# EAGLE board RFBoardLayoutGen0_v02.7_routed_final_PTworking_backup (EAGLE 7.6.0)
AUTHOR: Kirchschlager Raimund
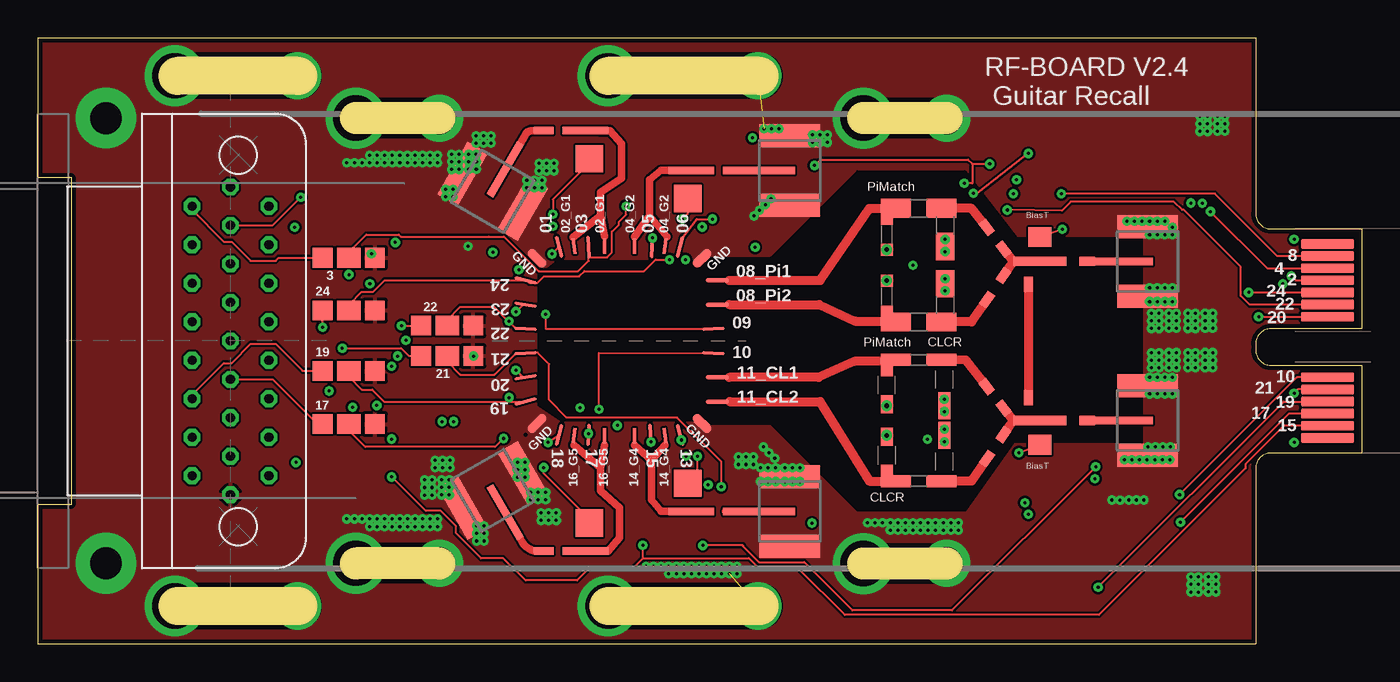
[diagram p0: board, top side]
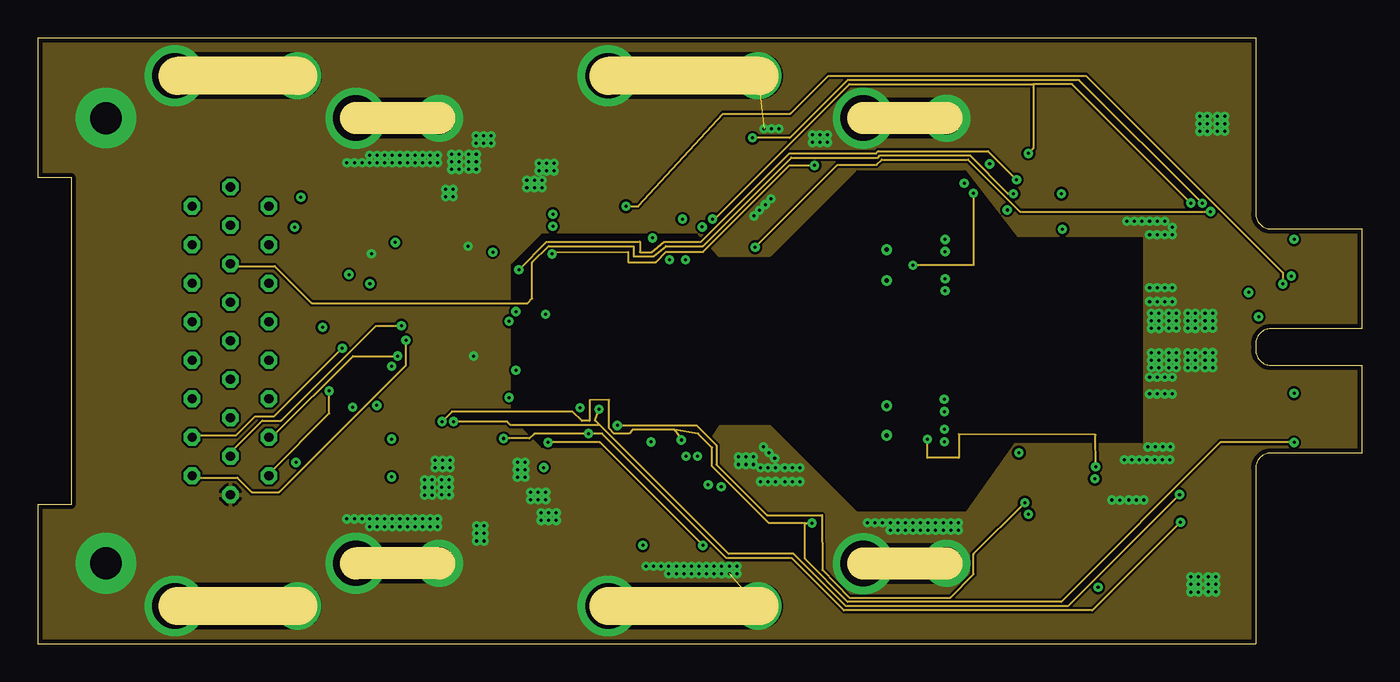
[diagram p1: board, inner layer Route2]
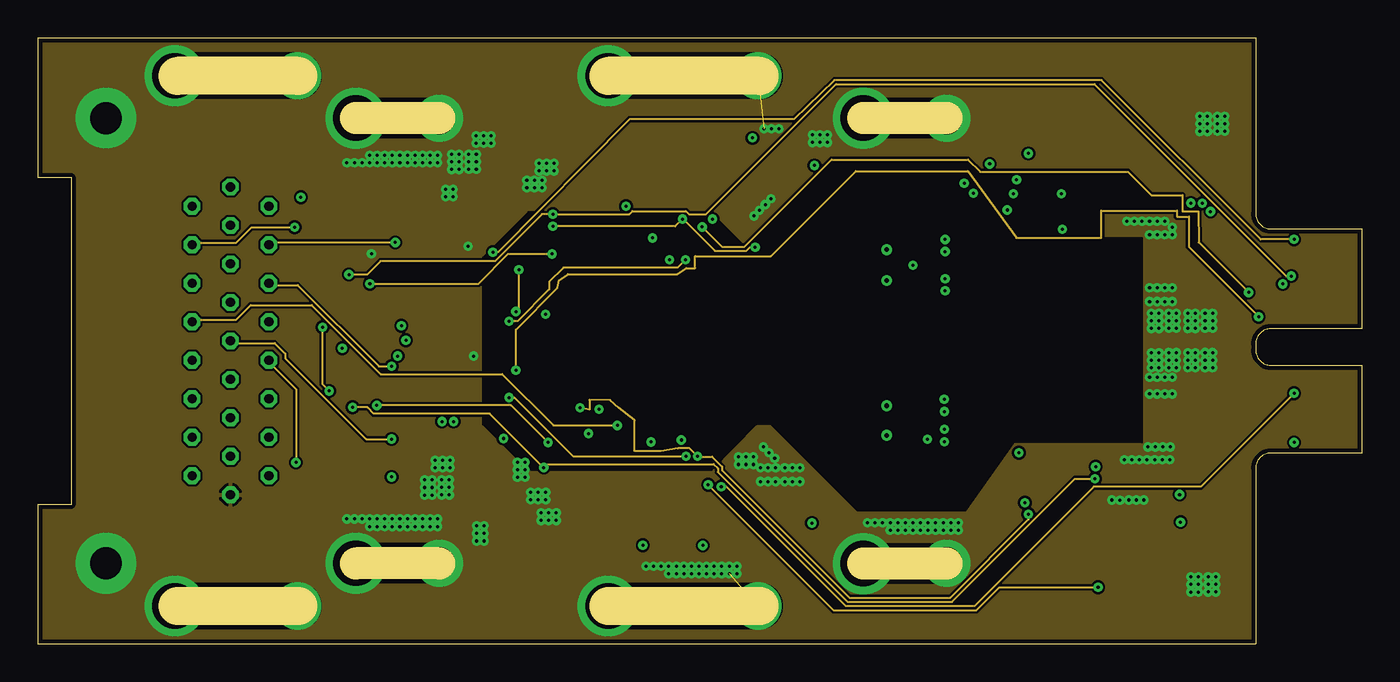
[diagram p2: board, inner layer Route15]
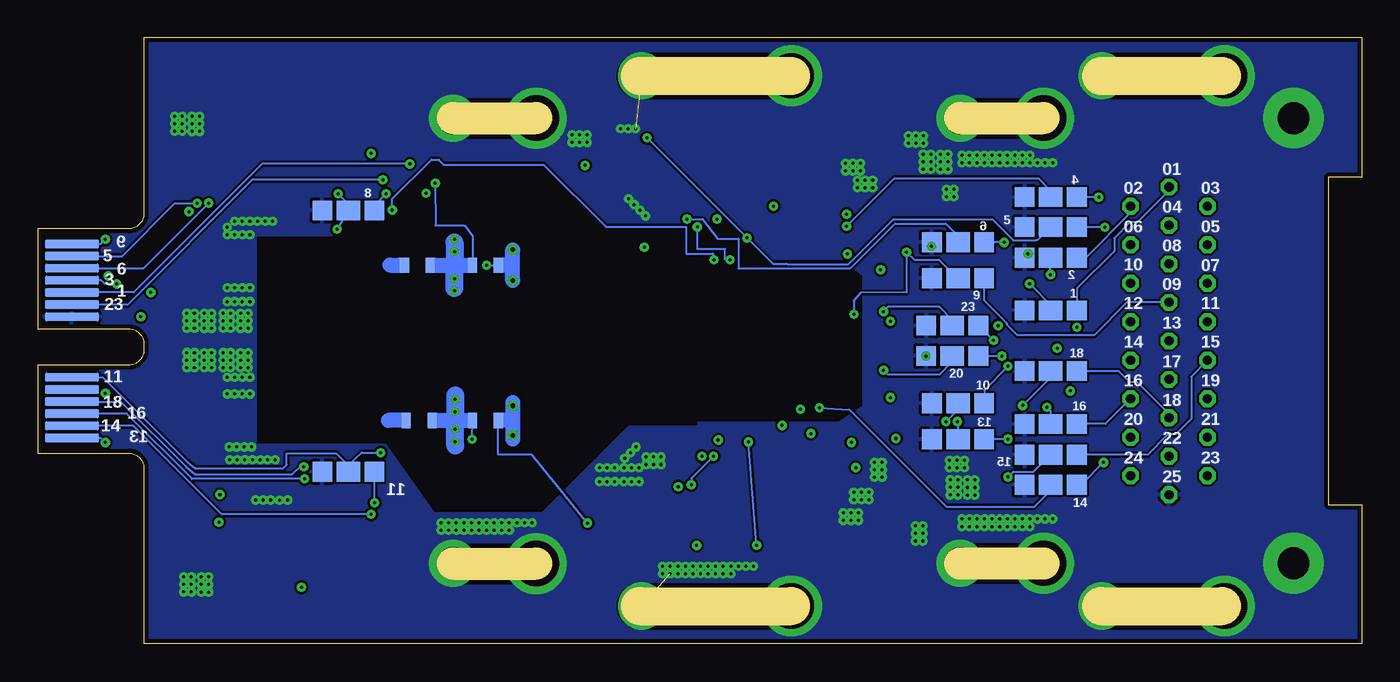
[diagram p3: board, bottom side, seen from below]

Size 87.4 x 40 mm. Coordinates in mm from the lower left corner, seen from the top.
Outline: 26.5,5.3 21,5.3
Outline: 26.5,34.7 21,34.7
Outline: 26.5,5.32 21,5.32
Outline: 17.2,37.5 9.2,37.5
Outline: 17.2,2.5 9.2,2.5
Outline: 47.65,2.5 37.65,2.5
Outline: 47.65,37.5 37.65,37.5
Outline: 60,34.7 54.5,34.7
Outline: 60,5.3 54.5,5.3
Outline: 0,40 0,30.8 2.2,30.8 2.2,9.2 0,9.2 0,0 80.4,0 80.4,11.6 arc-90 81.4,12.6 87.4,12.6 87.4,18.4 81.4,18.4 arc-90 80.4,19.4 80.4,19.8 arc-90 81.4,20.8 87.4,20.8 87.4,27.4 81.4,27.4 arc-90 80.4,28.4 80.4,40 0,40
Copper layers (1+2*15+16): Top 0.035mm / dielectric 0.38mm / Route2 0.035mm / dielectric 0.71mm / Route15 0.035mm / dielectric 0.38mm / Bottom 0.035mm
Design rules "PCB-POOL HighSpec_ML4+ *": minimum track width 0.125mm, minimum drill 0.2mm, track to track 0.125mm, track to pad 0.125mm, pad to pad 0.125mm, via to via 0.125mm, smd to smd 0.125mm, copper to edge 0.3mm, drill to drill 0.2mm, minimum pad ring 10mil, minimum via ring 8mil, stop-mask expansion 0.075mm, vias tented up to drill 0.2mm, thermal gap 0.2mm
Net classes: 0 GND: clearance 0.15 mm; 1 RF: clearance 1 mm

## Footprints (pad centres in the part's own frame; a part is rotated, then mirrored left to right if it is on the bottom)
BIAS_TEE_DOWN_0603 = smd 1.3 x 0.5: HF 3.25,0 | smd 1.8 x 1.8: LF 0.25,1.85 | smd 3 x 0.5: OUT 0.5,0
BIAS_TEE_UP_0603 = smd 1.3 x 0.5: HF 3.25,0 | smd 1.8 x 1.8: LF 0.25,-1.85 | smd 3 x 0.5: OUT 0.5,0
24DC+4RF/400MU-PADS/10.0X10.0_V1.5 = smd 0 x 0: BASE 0,0 | smd 1.5 x 0.6 rotated 315: P$1 -5.45,5.45; P$6 5.45,-5.45 | smd 1.5 x 0.6 rotated 45: P$3 5.45,5.45; P$7 -5.45,-5.45 | smd 1.5 x 0.2 rotated 93: P$4 2.05,-6.2; P$40 -2.05,6.2 | smd 0 x 0 rotated 45: P$5 -6.2,-6.2 | smd 1.5 x 0.2 rotated 345: P$26 -6.2,4 | smd 1.5 x 0.2 rotated 351: P$27 -6.2,2.4 | smd 1.5 x 0.2 rotated 357: P$28 -6.2,0.8; P$35 6.2,-0.8 | smd 1.5 x 0.2 rotated 3: P$29 -6.2,-0.8; P$34 6.2,0.8 | smd 1.5 x 0.2 rotated 9: P$30 -6.2,-2.4 | smd 1.5 x 0.2 rotated 15: P$31 -6.2,-4 | smd 1.5 x 0.3: P$32 6.45,4; P$33 6.45,2.4; P$36 6.45,-2.4; P$37 6.45,-4 | smd 1.5 x 0.2 rotated 105: P$38 -4,6.2; P$49 4,-6.2 | smd 1.5 x 0.2 rotated 87: P$42 2.15,6.2; P$45 -2.05,-6.2 | smd 1.5 x 0.2 rotated 75: P$43 4,6.2; P$44 -4,-6.2 | smd 1 x 0.2 rotated 97: RF$02_G11 -3,6.25; RF$14_G41 3,-6.25 | smd 0.2 x 1: RF$02_G12 -1,6.25; RF$04_G21 1,6.25; RF$14_G42 1,-6.25; RF$16_G51 -1,-6.25 | smd 1 x 0.2 rotated 83: RF$04_G22 3,6.25; RF$16_G52 -3,-6.25
25_SOCKET_M83513/13-D = drill 0.6 octagon: 01 10.16,0; 02 8.89,2.54; 03 6.35,2.54; 04 3.81,2.54; 05 2.54,0; 06 1.27,2.54; 07 0,0; 08 -1.27,2.54; 09 -2.54,0; 10 -3.81,2.54; 11 -6.35,2.54; 12 -8.89,2.54; 13 -10.16,0; 14 8.89,-2.54; 15 7.62,0; 16 6.35,-2.54; 17 5.08,0; 18 3.81,-2.54; 19 1.27,-2.54; 20 -1.27,-2.54; 21 -3.81,-2.54; 22 -5.08,0; 23 -6.35,-2.54; 24 -7.62,0; 25 -8.89,-2.54
MEC8-113-02-L-D-RA1 = smd 0.6 x 3.5: 1 6.4,0.15; 3 5.6,0.15; 5 4.8,0.15; 7 4,0.15; 9 3.2,0.15; 11 2.4,0.15; 13 -1.6,0.15; 15 -2.4,0.15; 17 -3.2,0.15; 19 -4,0.15; 21 -4.8,0.15; 23 -5.6,0.15; 25 -6.4,0.15 | smd 0.6 x 3.5 bottom: 2 6.4,0.15; 4 5.6,0.15; 6 4.8,0.15; 8 4,0.15; 10 3.2,0.15; 12 2.4,0.15; 14 -1.6,0.15; 16 -2.4,0.15; 18 -3.2,0.15; 20 -4,0.15; 22 -4.8,0.15; 24 -5.6,0.15; 26 -6.4,0.15
LP-FILTER/1_STAGE/OS/0603_TOP_V1_01 = smd 1.3 x 1.3: $1 -1.6,0.01; GND@1 1.85,0.01 | smd 1.55 x 1.3: $2 0.125,0.01
PI_MATCH_V01_UP = smd 2 x 1.25: $1 0,0; $3 3,0 | smd 0.8 x 1.4: $2 -0.6,0.375 | smd 1.2 x 1.8: $4 3.25,2.525 | smd 0.8 x 0.8: GND@1 -0.6,2.725
CLCR_V01_DOWN = smd 2 x 0.8: $1 0,0; $3 3,0 | smd 0.8 x 1.4: $2 -0.6,-0.375 | smd 0.8 x 1.2: GND@1 -0.6,-2.925 | smd 0.8 x 1.8: GND@2 3.2,-3.025
LP-FILTER/1_STAGE/OS/0603_BOTTOM_V1_01 = smd 1.3 x 1.3 bottom: $1 -1.6,0.01; GND@1 1.85,0.01 | smd 1.55 x 1.3 bottom: $2 0.125,0.01
SMP_STRAIGHT_MINI_WIDE_V1_01 = smd 0.5 x 4: 1 0,1.653 | smd 1.524 x 4: GND -2.292,0; GND@1 2.292,0
BIAS_TEE_UP_V01 = smd 1.5 x 1.3: P$1 0,-0.95 | smd 3.5 x 0.6: P$2 0,0.65
BIAS_TEE_DOWN_V01 = smd 1.5 x 1.3: P$1 0,0.95 | smd 3.5 x 0.6: P$2 0,-0.65
SMD1-0,6 = smd 1 x 0.6: 1 0,0
PI_MATCH_V01_DOWN = smd 2 x 1.25: $1 0,0; $3 3,0 | smd 0.8 x 1.4: $2 -0.6,-0.375 | smd 1.2 x 1.8: $4 3.25,-2.525 | smd 0.8 x 0.8: GND@1 -0.6,-2.725
CLCR_V01_UP = smd 2 x 0.8: $1 0,0; $3 3,0 | smd 0.8 x 1.4: $2 -0.6,0.375 | smd 0.8 x 1.2: GND@1 -0.6,2.925 | smd 0.8 x 1.8: GND@2 3.2,3.025
SMP_STRAIGHT_MINI_WIDE = smd 0.5 x 4: 1 0,1.653 | smd 1.524 x 4: 2@1 -2.292,0; 2@2 2.292,0

## Placement (x,y rotation side)
B$1  [BIAS_TEE_DOWN_0603]  36.65,33.88 180 top
B$2  [BIAS_TEE_UP_0603]  42.65,31.25 0 top
B$4  [BIAS_TEE_DOWN_0603]  42.65,8.75 0 top
B$5  [BIAS_TEE_UP_0603]  36.65,6.12 180 top
E$1  [24DC+4RF/400MU-PADS/10.0X10.0_V1.5]  38.4,20 0 top
E$2  [25_SOCKET_M83513/13-D]  12.71,20 90 top
E$3  [MEC8-113-02-L-D-RA1]  85,20 270 top
E$4  [LP-FILTER/1_STAGE/OS/0603_TOP_V1_01]  20.4,29.5 180 bottom
E$5  [LP-FILTER/1_STAGE/OS/0603_TOP_V1_01]  20.4,12.5 180 bottom
E$6  [LP-FILTER/1_STAGE/OS/0603_TOP_V1_01]  20.4,25.5 180 bottom
E$7  [LP-FILTER/1_STAGE/OS/0603_TOP_V1_01]  20.4,18 0 top
E$8  [LP-FILTER/1_STAGE/OS/0603_TOP_V1_01]  20.4,22 0 top
E$9  [PI_MATCH_V01_UP]  56.65,21.25 0 top
E$10  [CLCR_V01_DOWN]  56.65,18.75 0 top
E$11  [LP-FILTER/1_STAGE/OS/0603_TOP_V1_01]  26.9,21 0 top
E$12  [LP-FILTER/1_STAGE/OS/0603_TOP_V1_01]  20.4,14.5 0 top
E$13  [LP-FILTER/1_STAGE/OS/0603_TOP_V1_01]  66.78,11.38 180 bottom
E$14  [LP-FILTER/1_STAGE/OS/0603_TOP_V1_01]  66.78,28.62 180 bottom
E$15  [LP-FILTER/1_STAGE/OS/0603_TOP_V1_01]  26.9,19 0 top
E$16  [LP-FILTER/1_STAGE/OS/0603_BOTTOM_V1_01]  20.4,22 0 top
E$17  [LP-FILTER/1_STAGE/OS/0603_BOTTOM_V1_01]  20.4,14.5 0 top
E$18  [LP-FILTER/1_STAGE/OS/0603_BOTTOM_V1_01]  20.4,10.5 0 top
E$19  [LP-FILTER/1_STAGE/OS/0603_BOTTOM_V1_01]  26.9,21 0 top
E$20  [LP-FILTER/1_STAGE/OS/0603_BOTTOM_V1_01]  20.4,27.5 0 top
E$21  [LP-FILTER/1_STAGE/OS/0603_BOTTOM_V1_01]  20.4,18 0 top
E$22  [LP-FILTER/1_STAGE/OS/0603_BOTTOM_V1_01]  26.9,19 0 top
E$23  [LP-FILTER/1_STAGE/OS/0603_BOTTOM_V1_01]  20.4,25.5 180 bottom
E$24  [LP-FILTER/1_STAGE/OS/0603_BOTTOM_V1_01]  26.52,26.5 0 top
E$25  [LP-FILTER/1_STAGE/OS/0603_BOTTOM_V1_01]  26.52,24.12 0 top
E$26  [SMP_STRAIGHT_MINI_WIDE_V1_01]  73.28,25.25 90 top
E$27  [LP-FILTER/1_STAGE/OS/0603_BOTTOM_V1_01]  26.52,13.5 0 top
E$28  [LP-FILTER/1_STAGE/OS/0603_BOTTOM_V1_01]  26.52,15.88 0 top
E$29  [BIAS_TEE_UP_V01]  66.15,14.1 0 top
E$30  [BIAS_TEE_DOWN_V01]  66.15,25.9 0 top
E$31  [SMD1-0,6]  65.4,23.75 90 top
E$32  [PI_MATCH_V01_DOWN]  56.65,28.75 0 top
E$33  [SMP_STRAIGHT_MINI_WIDE_V1_01]  73.28,14.75 90 top
E$34  [SMD1-0,6]  57,25 90 bottom
E$35  [SMD1-0,6]  65.4,16.25 90 top
E$36  [SMD1-0,6]  58.7,25 90 bottom
E$37  [CLCR_V01_UP]  56.65,10.75 0 top
E$38  [SMD1-0,6]  62.65,27.48 128 top
E$39  [SMD1-0,6]  63.75,26.07 128 top
E$40  [SMD1-0,6]  62.65,16.98 128 top
E$41  [SMD1-0,6]  63.75,15.57 128 top
E$42  [SMD1-0,6]  63.75,24.3 235.5 top
E$43  [SMD1-0,6]  62.67,22.74 235.5 top
E$44  [SMD1-0,6]  63.75,13.8 235.5 top
E$45  [SMD1-0,6]  62.67,12.24 235.5 top
E$46  [SMD1-0,6]  57,14.75 90 bottom
E$47  [SMD1-0,6]  58.7,14.75 90 bottom
E$48  [SMD1-0,6]  69.28,14.75 0 top
E$49  [SMD1-0,6]  61.5,25 90 bottom
E$50  [SMD1-0,6]  63.2,25 90 bottom
E$51  [SMD1-0,6]  61.38,14.75 90 bottom
E$52  [SMD1-0,6]  63.08,14.75 90 bottom
E$54  [SMD1-0,6]  69.28,25.25 0 top
S$2  MC-921SMALL  [SMP_STRAIGHT_MINI_WIDE]  30.02,10.12 210 top
S$3  MC-921SMALL  [SMP_STRAIGHT_MINI_WIDE]  49.65,8.75 90 top
S$6  MC-921SMALL  [SMP_STRAIGHT_MINI_WIDE]  49.65,31.25 90 top
S$7  MC-921SMALL  [SMP_STRAIGHT_MINI_WIDE]  30.02,29.88 330 top

## Library data of the parts
B$1 B$2 B$4 B$5 E$29 E$30 = Bias tee
E$1 = SampleArea
E$2 = Glenair
E$3 = MEC8-130-02-X-D-RA1
E$4-E$8 E$11-E$25 E$27 E$28 = LPFilter
E$9 E$10 E$32 E$37 = MatchCircuit
E$26 E$33 S$2 S$3 S$6 S$7 = RF Connectors
E$31 E$34-E$36 E$38-E$52 E$54 = PADS

## Nets
D$2: B$1.LF E$3.19 E$6.$2
D$4: B$2.LF E$3.21 E$4.$2
GND: E$1.P$1 E$1.P$3 E$1.P$6 E$1.P$7 E$2.13 E$3.14 E$4.GND@1 E$5.GND@1 E$6.GND@1 E$7.GND@1 E$8.GND@1 E$11.GND@1 E$12.GND@1 E$13.GND@1 E$14.GND@1 E$15.GND@1 E$16.GND@1 E$17.GND@1 E$18.GND@1 E$19.GND@1 E$20.GND@1 E$21.GND@1 E$22.GND@1 E$23.GND@1 E$24.GND@1 E$25.GND@1 E$26.GND E$26.GND@1 E$27.GND@1 E$28.GND@1 E$33.GND E$33.GND@1 S$2.2@1 S$2.2@2 S$3.2@1 S$3.2@2 S$6.2@1 S$6.2@2 S$7.2@1 S$7.2@2
S$1: E$1.P$30 E$3.13 E$22.$2
S$2: E$1.P$44 E$3.8 E$21.$2 E$47.1
S$55: E$1.P$49 E$3.2 E$27.$2 E$46.1
S$67: E$2.24 E$11.$1
S$68: E$1.P$29 E$3.9 E$15.$2
S$76: E$2.11 E$15.$1
S$79: E$1.P$27 E$3.16 E$19.$2
S$80: E$2.12 E$19.$1
S$81: E$3.10
S$83: E$2.23 E$22.$1
S$84: E$1.P$26 E$3.17 E$8.$2
S$85: E$2.25 E$8.$1
S$86: E$1.P$38 E$3.18 E$16.$2 E$36.1
S$88: E$2.01 E$16.$1
S$89: E$1.P$31 E$3.7 E$7.$2
S$90: E$2.10 E$7.$1
S$95: E$2.22 E$21.$1
S$144: E$2.14 E$6.$1
S$145: E$1.P$40 E$3.20 E$23.$2
S$146: E$2.02 E$23.$1
S$147: B$5.LF E$3.6 E$17.$2
S$149: E$2.15 E$4.$1
S$150: E$1.P$42 E$3.24 E$20.$2
S$151: E$2.03 E$20.$1
S$152: E$1.P$45 E$3.5 E$12.$2
S$154: E$2.09 E$12.$1
S$155: B$4.LF E$3.4 E$18.$2
S$156: E$2.21 E$17.$1
S$157: E$1.P$4 E$3.3 E$5.$2
S$158: E$2.08 E$5.$1
S$160: E$2.20 E$18.$1
S$162: E$2.16 E$24.$1
S$168: E$2.17 E$14.$1
S$169: E$1.P$34 E$3.26 E$25.$2
S$170: E$2.05 E$25.$1
S$171: E$2.07 E$27.$1
S$174: E$1.P$28 E$3.15 E$11.$2
S$175: E$2.06 E$13.$1
S$177: E$1.P$35 E$3.11 E$28.$2
S$178: E$2.18 E$28.$1
S$183: E$3.12 E$13.$2 E$29.P$1
S$190: E$3.23 E$14.$2 E$30.P$1
S$199: E$30.P$2
S$211: E$3.22 E$24.$2 E$34.1
S$225: E$1.P$43
S$226: E$3.25

## Tracks (layer width: path | path; a pad name or v marks a point on that pad's centre or on a via)
D$2  (via drill 0.2)
  Top 0.125: v34,28.36 34,29.34 36.4,31.74 B$1.LF | E$3.19 83.04,24 v82.76,24.28
  Route15 0.125: v20.54,24.38 21.74,24.38 22.62,25.26 30.18,25.26 33.28,28.36 v34,28.36 39.06,28.36 39.26,28.56 42.78,28.56 42.98,28.36 44.12,28.36 52.7,36.94 69.76,36.94 82.42,24.28 v82.76,24.28
  Bottom 0.125: v20.54,24.38 20.54,25.48 E$6.$2
D$4  (via drill 0.2)
  Top 0.125: v42.56,28.04 42.9,28.38 B$2.LF | E$3.21 81.16,24.8 v77.42,28.54
  Route2 0.125: v77.42,28.54 64.84,28.54 61.42,31.96 55.72,31.96 55.38,31.62 52.8,31.62 v47.36,26.18
  Route15 0.125: v34,27.56 42.08,27.56 v42.56,28.04 42.62,28.02 44.7,25.94 46.78,25.94 47.02,26.18 v47.36,26.18
  Bottom 0.125: v34,27.56 30.84,30.72 21.34,30.72 20.54,29.92 20.54,29.5 E$4.$2
GND  (via drill 0.2, 2.1, 2.1 pad 4, 3, 3 pad 0.25)  (4 unrouted)
  other vias: 37.65,37.5 47.55,37.5 4.5,34.7 21,34.7 26.5,34.7 9.05,37.5 17.15,37.5 54.5,5.3 37.65,2.5 47.55,2.5 60,5.32 54.5,34.7 60,34.7 4.5,5.32 21,5.32 26.5,5.32 9.05,2.5 17.15,2.5 20.4,31.75 20.9,31.75 21.4,31.75 21.9,31.75 22.4,31.75 22.9,31.75 23.4,31.75 23.9,31.75 24.4,31.75 24.9,31.75 25.4,31.75 25.9,31.75 26.4,31.75 26.4,32.25 25.9,32.25 25.4,32.25 24.9,32.25 24.4,32.25 23.9,32.25 23.4,32.25 22.9,32.25 22.4,32.25 21.9,32.25 26.4,8.25 25.9,8.25 25.4,8.25 24.9,8.25 24.4,8.25 23.9,8.25 23.4,8.25 22.9,8.25 22.4,8.25 21.9,8.25 21.4,8.25 20.9,8.25 20.4,8.25 21.9,7.75 22.4,7.75 22.9,7.75 23.4,7.75 23.9,7.75 24.4,7.75 24.9,7.75 25.4,7.75 25.9,7.75 26.4,7.75 46.15,5.12 45.65,5.12 45.15,5.12 44.65,5.12 44.15,5.12 43.65,5.12 43.15,5.12 42.65,5.12 42.15,5.12 41.65,5.12 41.15,5.12 40.65,5.12 40.15,5.12 41.65,4.62 42.15,4.62 42.65,4.62 43.15,4.62 43.65,4.62 44.15,4.62 44.65,4.62 45.15,4.62 45.65,4.62 46.15,4.62 60.77,8 60.27,8 59.77,8 59.27,8 58.77,8 58.27,8 57.77,8 57.27,8 56.77,8 56.27,8 55.77,8 55.27,8 54.77,8 56.27,7.5 56.77,7.5 57.27,7.5 57.77,7.5 58.27,7.5 58.77,7.5 59.27,7.5 59.77,7.5 60.27,7.5 60.77,7.5 74.78,13 74.28,13 73.78,13 73.28,13 74.9,16.5 74.4,16.5 73.9,16.5 73.4,16.5 74.9,17.6 74.4,17.6 73.9,17.6 73.4,17.6 74.9,23.5 74.4,23.5 73.9,23.5 73.4,23.5 74.9,27 74.4,27 73.9,27 73.4,27 74.9,27.5 74.4,27.9 73.9,27.9 73.4,27.9 72.9,27.9 72.4,27.9 71.9,27.9 74.9,22.6 74.4,22.6 73.9,22.6 73.4,22.6 74.73,12.16 74.23,12.16 73.73,12.16 73.23,12.16 72.73,12.16 72.23,12.16 71.73,12.16 70.9,9.5 71.45,9.47 72.03,9.5 72.53,9.5 73.03,9.5 47.65,28.62 48.02,29 48.4,29.38 47.27,28.25 48.65,12.25 48.27,12.62 47.9,13 28.4,26.25 28.77,19 22.02,25.75 28.95,31.32 28.95,31.82 28.95,32.33 28.45,32.33 28.45,31.82 28.45,31.32 27.82,31.32 27.82,31.82 27.82,32.32 27.32,32.32 27.32,31.82 27.32,31.32 28.92,33.04 29.42,33.04 29.92,33.04 29.92,33.54 29.42,33.54 28.92,33.54 33.09,31.22 33.59,31.22 34.09,31.22 34.09,31.72 33.59,31.72 33.09,31.72 32.28,30.11 32.78,30.11 33.28,30.11 33.28,30.61 32.78,30.61 32.28,30.61 51.14,33.1 51.64,33.1 52.14,33.1 52.14,33.6 51.64,33.6 51.14,33.6 46.25,11.84 46.75,11.84 47.25,11.84 47.25,12.34 46.75,12.34 46.25,12.34 47.71,10.72 48.21,10.72 48.71,10.72 48.71,11.62 48.21,11.62 47.71,11.62 31.66,11.99 31.66,11.49 31.66,10.99 32.16,10.99 32.16,11.49 32.16,11.99 32.53,9.52 33.03,9.52 33.53,9.52 33.53,10.02 33.03,10.02 32.53,10.02 33.23,8.15 33.73,8.15 34.23,8.15 34.23,8.65 33.73,8.65 33.23,8.65 27.22,12.12 26.72,12.12 26.22,12.12 26.22,11.62 26.72,11.62 27.22,11.62 26.02,9.82 26.02,10.32 26.02,10.82 25.52,10.82 25.52,10.32 25.52,9.82 27.16,9.83 27.16,10.33 27.16,10.83 26.66,10.83 26.66,10.33 26.66,9.83 29.46,6.79 29.46,7.29 29.46,7.79 28.96,7.79 28.96,7.29 28.96,6.79 74.03,20.82 74.03,21.32 74.03,21.82 73.53,21.82 73.53,21.32 73.53,20.82 75.16,20.83 75.16,21.33 75.16,21.83 74.66,21.83 74.66,21.33 74.66,20.83 74.03,18.23 74.03,18.73 74.03,19.23 73.53,19.23 73.53,18.73 73.53,18.23 75.16,18.23 75.16,18.73 75.16,19.23 74.66,19.23 74.66,18.73 74.66,18.23 76.42,20.82 76.42,21.32 76.42,21.82 75.92,21.82 75.92,21.32 75.92,20.82 77.56,20.83 77.56,21.33 77.56,21.83 77.06,21.83 77.06,21.33 77.06,20.83 76.42,18.23 76.42,18.73 76.42,19.23 75.92,19.23 75.92,18.73 75.92,18.23 77.56,18.23 77.56,18.73 77.56,19.23 77.06,19.23 77.06,18.73 77.06,18.23 48.94,34 48.44,34 47.94,34 27.42,29.52 27.42,30.02 26.92,30.02 26.92,29.52 49.31,10.72 49.81,10.72 50.31,10.72 50.31,11.62 49.81,11.62 49.31,11.62 77.22,33.83 77.22,34.33 77.22,34.83 76.72,34.83 76.72,34.33 76.72,33.83 78.36,33.83 78.36,34.33 78.36,34.83 77.86,34.83 77.86,34.33 77.86,33.83 76.62,3.43 76.62,3.93 76.62,4.43 76.12,4.43 76.12,3.93 76.12,3.43 77.76,3.43 77.76,3.93 77.76,4.43 77.26,4.43 77.26,3.93 77.26,3.43
  pour Top (rank 6): -4.85,43.6 92.1,43.7 92.1,-4.7 -4.85,-4.8
  pour Route2 (rank 6): -7.5,45.1 92.6,45.6 92.6,-5.15 -7.5,-5.65
  pour Route15 (rank 6): -11.25,48.5 94.9,48.5 94.9,-11.4 -11.25,-11.4
  pour Bottom (rank 6): -16.65,53.3 97.15,53.2 97.15,-15.85 -16.65,-15.75
N$3
  Top 0.5: 37.02,33.88 37.77,33.88 38.52,33 38.52,30.75 37.15,29.8 37.15,28.38
S$1  (via drill 0.2)
  Top 0.125: v31.56,18.06 32.02,17.6 E$1.P$30 32.01,17.59 v31.56,18.06 | v80.6,21.6 E$3.13
  Route15 0.125: v31.56,18.06 31.56,20.74 34.3,23.5 34.4,24 35,24.4 42.2,24.4 42.8,24.8 43.4,24.8 43.4,25.6 48.4,25.6 54,31.2 61.4,31.2 64.6,26.8 70.2,26.8 70.2,28.6 75.2,28.6 75.2,28.2 76,28.2 76,26.2 v80.6,21.6
  Bottom 0.125: v31.56,18.06 31.28,17.78 27.88,17.78 27.04,18.62 27.04,19 E$22.$2
S$2  (via drill 0.2)
  Top 0.125: v43.9,6.5 46.54,6.5 46.54,6.46 47.6,5.4 50.6,5.4 53.78,2.22 60.36,2.22 v69.84,11.7 | v33.68,13.3 E$1.P$44
  Route2 0.125: v33.68,13.3 37.1,13.3 v43.9,6.5 | v69.84,11.7 69.83,13.8 60.8,13.85 60.8,12.28 58.72,12.28 v58.72,13.5
  Route15 0.125: v22.38,15.74 31.24,15.74 v33.68,13.3
  Bottom 0.125: v22.38,15.74 20.54,17.58 20.54,18 E$21.$2 | v69.84,11.7 70.1,11.7 70.6,11.2 77,11.2 77.62,11.7 81.92,16 E$3.8 | v58.72,13.5 E$47.1
S$12  (via drill 0.2)
  other vias: 59.9,25.89
S$17
  cutout Route15: 44.46,11.51 42.9,11.5 32.4,11.5 29.4,14.5 29.4,19.5 29.4,20.5 29.4,25.5 32.4,28.5 44.4,28.5 47.4,25.5 47.4,20.5 47.4,19.5 47.4,14.5
S$55  (via drill 0.2)
  Top 0.125: v42.48,13.46 E$1.P$49
  Route2 0.125: v26.68,14.68 27.34,15.34 35.3,15.34 35.92,14.72 36.41,14.73 36.42,16.09 37.72,16.12 37.72,14.22 38.05,13.88 39.02,13.88 39.27,14.12 42.02,14.12 | 42.02,14.12 43.59,13.88 44.52,12.96 44.52,11.72 48.25,7.98 50.65,7.98 | 50.65,7.98 50.65,5.62 53.46,2.78 67.56,2.78 78.08,13.3 v82.94,13.3 | 50.65,7.98 v51.1,7.98 | 42.02,14.12 v42.48,13.46
  Bottom 0.125: v26.68,14.68 26.66,14.66 E$27.$2 | v82.94,13.3 83.24,13.6 E$3.2 | v51.1,7.98 54.77,12.5 57,12.5 E$46.1
S$67  (via drill 0.2)
  Top 0.125: v24,21 E$11.$1
  Route2 0.125: v24,21 22.32,21 16.06,14.74 14.82,14.74 12.72,12.64 E$2.24
S$68  (via drill 0.2)
  Top 0.125: E$15.$2 27.04,19 27.04,18.62 27.88,17.78 30.14,17.78 31.56,19.2 E$1.P$29 32.26,19.22 33,19.22 33.76,18.46 33.76,16.1 34.92,14.94 42.2,14.94 45.12,12.02 v45.12,10.38 | v82.94,16.54 83.2,16.8 E$3.9
  Route15 0.125: v45.12,10.38 45.46,10.38 53.34,2.5 61.84,2.5 69.72,10.38 76.78,10.38 v82.94,16.54
S$76  (via drill 0.2)
  Top 0.125: v20.1,19.52 23.98,19.52 24.48,19.02 E$15.$1
  Route2 0.125: v20.1,19.52 15.6,15.02 14.34,15.02 13.1,13.78 10.3,13.78 E$2.11
S$79  (via drill 0.2)
  Top 0.125: E$1.P$27 32.02,22.4 v31.56,21.94
  Route2 0.125: v64.62,30.64 62.74,32.52 55.48,32.52 55.34,32.38 49.62,32.38 43.78,26.54 41.34,26.54 40.52,25.87 39.74,25.87 39.74,26.56 33.6,26.54 v31.76,24.7
  Route15 0.125: v31.76,24.7 31.76,22.14 v31.56,21.94
  Bottom 0.125: v31.56,21.94 31.26,22.24 27.88,22.24 27.04,21.4 27.04,21.02 E$19.$2 | E$3.16 81.48,22.4 73.24,30.64 v64.62,30.64
S$80  (via drill 0.2)
  Route2 0.125: v24.3,20.04 24.3,18.4 15.92,10.02 14.12,10.02 13.16,10.98 10.3,10.98 E$2.12
  Bottom 0.125: v24.3,20.04 25.26,21 E$19.$1
S$82
  cutout Route15: 43.96,13.01 33.3,13.01 31.3,14.99 31.3,25.02 33.3,27 43.5,27 45.43,24.94 45.43,15.29
  cutout Bottom: 42.46,14.76 34.55,14.76 33.05,15.74 33.05,24.27 34.3,25.25 42.5,25.25 43.89,25.24 43.89,14.75
  cutout Top: 42.46,14.76 34.55,14.76 33.05,15.74 33.05,24.27 34.3,25.25 42.5,25.25 43.89,25.24 43.89,14.75
S$83  (via drill 0.2)
  Route2 0.125: v23.76,19 20.8,19 15.46,13.66 E$2.23
  Bottom 0.125: v23.76,19 E$22.$1
S$84  (via drill 0.2)
  Top 0.125: E$8.$2 20.54,22.02 20.54,22.4 21.38,23.24 22.12,23.24 22.88,24 E$1.P$26 32.26,24.02 32.44,23.84 33,23.84 33.42,24.26 35.74,24.26 36.08,24.6 40.02,24.6 40.78,25.36 v41.7,25.36 | v79.94,23.2 E$3.17
  Route15 0.125: v79.94,23.2 76.65,26.5 76.62,28.54 75.56,28.55 75.56,29.62 73.53,29.62 71.98,31.16 62.22,31.16 61.42,31.96 52.4,31.96 46.66,26.22 45.16,26.22 v43.86,27.52
  Bottom 0.125: v41.7,25.36 42.02,25.36 42.02,26.05 43.86,26.05 v43.86,27.52
S$85  (via drill 0.2)
  Top 0.125: v18.8,20.9 E$8.$1
  Route2 0.125: v19.24,16.7 19.24,15.22 15.26,11.24 E$2.25
  Route15 0.125: v18.8,20.9 18.8,17.14 v19.24,16.7
S$86  (via drill 0.2)
  Top 0.125: v33.94,25.74 E$1.P$38 | 61.7,31.68 v62.84,31.68 | 61.7,31.68 61.42,31.96 51.66,31.96 v51.28,31.58 | 61.7,31.68 61.7,30.4 v61.16,30.4
  Route2 0.125: v51.28,31.58 49.62,31.58 43.92,25.88 41.46,25.88 40.8,25.2 38.98,25.2 38.98,25.86 34.08,25.88 v33.94,25.74
  Route15 0.125: v33.94,25.74 31.06,25.74 29.1,23.78 v21.92,23.78
  Bottom 0.125: v21.92,23.78 20.54,22.4 20.54,22.02 E$16.$2 | E$3.18 81.08,23.2 72.6,31.68 v62.84,31.68 | E$36.1 58.7,26.92 59.24,27.62 61.15,27.62 v61.16,30.4
S$88
  Bottom 0.125: E$16.$1 18.8,23.46 16.34,25.92 16.34,26.78 15.3,27.82 14.8,27.82 12.72,29.9 E$2.01
S$89  (via drill 0.2)
  Top 0.125: 30.92,16 22.86,16 22.08,16.78 21.38,16.78 20.54,17.62 20.54,18 E$7.$2 | 30.92,16 E$1.P$31 | E$3.7 82.26,16 v70,3.74 | v31.12,16.26 30.92,16.06 30.92,16
  Route15 0.125: v70,3.74 63.48,3.74 61.96,2.22 52.54,2.22 v44.26,10.5 | v42.8,12.38 35.34,12.38 31.46,16.26 v31.12,16.26
  Bottom 0.125: v44.26,10.5 44.26,10.92 v42.8,12.38
S$90
  Top 0.125: E$7.$1 17.48,18.02 15.7,19.8 14.04,19.8 12.78,18.54 12.28,18.54 10.18,16.44 E$2.10
S$91
  Top 0.5: 45.65,31.25 49.65,31.25
S$95
  Bottom 0.125: E$21.$1 16.04,18 15.3,17.26 14.8,17.26 12.72,15.18 E$2.22
S$116
  Top 0.6: 64.4,25.25 63.65,26.2
S$144
  Bottom 0.125: E$6.$1 18.22,25.5 15.26,28.46 E$2.14
S$145  (via drill 0.2)
  Top 0.125: E$23.$2 20.54,25.5 20.54,25.88 21.68,27.02 23.82,27.02 23.96,26.88 29.77,26.88 30.78,26.88 33.06,24.6 35.68,24.6 36.36,25.28 E$1.P$40 36.42,25.52 37.58,25.52 37.9,25.84 37.9,27.22 38.36,27.68 38.36,27.86 38.84,28.34 v38.84,28.88
  Route2 0.125: v82.2,23.76 82.2,24.5 69.2,37.5 52.2,37.5 49.67,35 45.24,34.99 39.64,28.88 v38.84,28.88
  Bottom 0.125: E$3.20 83.22,24 82.98,23.76 v82.2,23.76
S$146
  Top 0.125: E$23.$1 15.9,25.48 15.7,25.28 14.04,25.28 12.78,26.54 12.28,26.54 10.18,28.64 E$2.02
S$147  (via drill 0.2)
  Top 0.125: v33.4,11.64 33.4,11.26 36.4,8.26 B$5.LF
  Route15 0.125: v20.78,15.62 21.76,15.62 22.18,15.2 29.84,15.2 v33.4,11.64 33.26,11.86 44.62,11.86 44.9,11.58 44.9,11.34 53.46,2.78 60.36,2.78 68.48,10.9 v69.78,10.9
  Bottom 0.125: v20.78,15.62 20.54,15.38 20.54,14.52 E$17.$2 | E$3.6 81.52,15.2 77.22,10.9 v69.78,10.9
S$149  (via drill 0.2)
  Top 0.125: v17.36,29.48 15.5,27.62 E$2.15
  Bottom 0.125: v17.36,29.48 E$4.$1
S$150  (via drill 0.2)
  Top 0.125: E$1.P$42 v40.58,26.8
  Route2 0.125: v47.18,33.4 49.64,33.4 53.46,37.22 68.74,37.22 v76.88,29.08
  Bottom 0.125: v47.18,33.4 40.28,26.5 | 40.28,26.5 38.88,25.1 37.96,25.1 37.92,25.06 33.88,25.06 30.92,28.02 24.38,28.02 23,26.64 21.5,26.64 21.48,26.66 21.38,26.66 20.54,27.5 E$20.$2 | v76.88,29.08 78.36,29.08 81.84,25.6 E$3.24 | v40.58,26.8 40.28,26.5
S$151  (via drill 0.2)
  Route15 0.125: v16.96,27.5 14.12,27.5 13.1,26.48 10.3,26.48 E$2.03
  Bottom 0.125: v16.96,27.5 E$20.$1
S$152  (via drill 0.2)
  Top 0.125: v30.74,13.56 30.18,13 21.62,13 20.54,14.08 20.54,14.5 E$12.$2 | v75.44,8.04 82.6,15.2 E$3.5 | v36.35,13.88 36.37,14.25 E$1.P$45
  Route2 0.125: v30.74,13.56 32.46,13.56 32.78,13.88 37.02,13.88 | v75.44,8.04 69.62,2.22 53.22,2.22 49.78,5.66 45.48,5.66 37.26,13.88 37.02,13.88 | 37.02,13.88 v36.35,13.88
S$154
  Top 0.125: E$2.09 15.5,17.46 18.44,14.52 E$12.$1
S$155  (via drill 0.2)
  Top 0.125: v43.56,12.38 43.56,11.26 B$4.LF
  Route15 0.125: v35.8,15.59 36.42,15.46 36.42,16.11 37.78,16.09 38.34,15.59 39.4,14.75 39.4,12.73 41.14,12.72 42.26,12.9 43.04,12.9 v43.56,12.38 43.62,12.36 44.52,12.36 45.18,11.7 45.18,11.46 53.58,3.06 60.24,3.06 65.4,8.22 v65.4,8.56
  Bottom 0.125: v35.8,15.59 33.82,15.46 27.42,9.06 21.6,9.06 20.54,10.12 20.54,10.5 E$18.$2 | E$3.4 81.12,14.4 75.28,8.56 v65.4,8.56
S$156
  Bottom 0.125: E$17.$1 16.92,14.52 E$2.21
S$157  (via drill 0.2)
  Top 0.125: v23.36,11.02 25.6,8.78 26.6,8.78 27.6,7.78 27.6,7.32 29.26,5.65 30.72,5.65 31.8,4.6 32.2,4.2 35.6,4.2 36.4,5 39.28,5 39.94,5.66 | E$3.3 82.26,14.4 79.72,11.86 79.72,11.58 70.06,1.92 53.28,1.92 50.2,5 47.6,5 46.94,5.66 39.94,5.66 | 39.94,5.66 v39.94,6.52 | v40.48,13.33 E$1.P$4
  Bottom 0.125: v23.36,11.02 23,11.38 21.68,11.38 20.58,12.48 20.54,12.48 E$5.$2 | v39.94,6.52 v40.48,13.33
S$158
  Bottom 0.125: E$5.$1 14.12,12.5 12.78,13.84 12.28,13.84 11.26,14.86 11.26,17.64 E$2.08
S$159
  Top 0.5: 33.52,33.88 32.77,33.88
S$160  (via drill 0.2)
  Route15 0.125: v17.04,11.98 17.04,16.82 15.26,18.6 E$2.20
  Bottom 0.125: v17.04,11.98 18.5,10.52 E$18.$1
S$161
  Bottom 1.2: 59.9,23.5 59.9,24.9
S$162  (via drill 0.2)
  Route15 0.125: v23.6,26.5 15.4,26.5 E$2.16
  Bottom 0.125: v23.6,26.5 E$24.$1
S$163  (via drill 0.2)
  other vias: 59.85,15.34
S$164
  Bottom 1.2: 59.85,16.4 59.85,14.98
S$165
  cutout Route2: 43.96,13.01 33.3,13.01 31.3,14.99 31.3,25.02 33.3,27 43.5,27 45.43,24.94 45.43,15.29
S$166  (via drill 0.2)
  other vias: 59.9,24.11
S$167
  Bottom 1: 56.05,24 56.05,26
S$168  (via drill 0.2)
  Route2 0.125: v64.4,29.72 64.06,29.72 61.54,32.24 55.6,32.24 55.46,32.1 49.74,32.1 43.9,26.26 41.46,26.26 40.66,25.59 39.34,25.59 39.34,26.24 33.72,26.26 32.64,25.18 32.64,22.8 32.34,22.5 18.08,22.5 15.64,24.94 12.86,24.94 E$2.17
  Bottom 0.125: v64.4,29.72 65.16,28.96 E$14.$1
S$169  (via drill 0.2)
  Top 0.125: v33.52,21.76 33.52,20.8 E$1.P$34
  Route15 0.125: v82.94,26.7 80.74,26.7 70.22,37.22 52.58,37.22 49.91,34.64 39.07,34.64 30.38,25.86 v30.04,25.86
  Bottom 0.125: v82.94,26.7 83.24,26.4 E$3.26 | E$25.$2 26.7,24.14 27.92,25.36 29.54,25.36 v30.04,25.86 30.04,23.2 33.08,23.18 33.52,22.68 v33.52,21.76
S$170
  Bottom 0.125: E$2.05 15.5,22.54 17.66,20.38 22.72,20.38 23.42,21.08 23.42,21.16 24.92,22.66 E$25.$1
S$171  (via drill 0.2)
  Route15 0.125: v23.36,13.52 21.68,13.52 16.34,18.86 16.34,19.16 15.64,19.86 12.86,19.86 E$2.07
  Bottom 0.125: v23.36,13.52 E$27.$1
S$172
  Bottom 1: 56.1,25 56.8,25
S$173
  Bottom 1: 61.25,25 58.9,25
S$174  (via drill 0.2)
  Top 0.125: E$1.P$28 31.56,20.8 31.09,21.27 | 31.09,21.27 30.12,22.24 27.88,22.24 27.04,21.4 27.04,21.02 E$11.$2 | v64,28.64 67.6,28.6 68.2,29.2 75,29.2 75.56,28.64 75.66,28.64 79.42,24.88 79.42,22.98 80,22.4 E$3.15 | v31.12,21.3 31.09,21.27
  Route15 0.125: v31.12,21.3 31.66,21.3 33.76,23.4 33.76,23.9 34.7,24.84 42.24,24.84 v42.76,25.36
  Bottom 0.125: v42.76,25.36 42.84,25.44 42.84,25.76 44.6,25.76 44.6,27.52 49.9,27.52 54,31.62 60.6,31.62 60.94,31.96 61.42,31.96 64,29.38 v64,28.64
S$175  (via drill 0.2)
  Route2 0.125: v65.16,9.32 61.78,5.94 61.78,4.6 60.24,3.06 53.58,3.06 51.8,4.89 51.77,8.5 48.15,8.5 44.8,11.84 44.8,13.1 43.48,14.42 v38.26,14.42
  Route15 0.125: v38.26,14.42 34.04,14.42 30.66,17.8 22.64,17.8 18.08,22.36 14.06,22.36 13.1,21.4 10.3,21.4 E$2.06
  Bottom 0.125: v65.16,9.32 E$13.$1
S$176
  Top 0.6: 45.65,24 51.65,24 54.9,28.75 56.4,28.75
S$177  (via drill 0.2)
  Top 0.125: v75.38,9.86 83.12,17.6 E$3.11 | v37.05,15.5 37.03,19.21 E$1.P$35
  Route2 0.125: v27.44,14.68 30.98,14.68 31.22,14.44 37.1,14.44 | 37.1,14.44 45.6,5.94 49.9,5.94 53.34,2.5 68.02,2.5 v75.38,9.86 | 37.1,14.44 36.77,14.75 v37.05,15.5
  Bottom 0.125: v27.44,14.68 26.66,15.46 E$28.$2
S$178  (via drill 0.2)
  Route15 0.125: v23.36,18.32 22.52,18.32 17.16,23.68 15.38,23.68 E$2.18
  Bottom 0.125: v23.36,18.32 24.92,16.76 24.92,15.9 E$28.$1
S$180
  Top 0.6: 45.65,22.4 51.6,22.4 53.95,21.3 56.6,21.3
S$181
  cutout Top: 43.9,25.5 48.4,25.5 54.1,31.2 61.2,31.2 64.6,26.8 72.9,26.8 72.9,13.3 64.4,13.3 61.2,8.8 54.2,8.8 54.1,8.8 48.4,14.5 43.9,14.5
  cutout Route2: 43.9,25.5 48.4,25.5 54.1,31.2 61.2,31.2 64.6,26.8 72.9,26.8 72.9,13.3 64.4,13.3 61.2,8.8 54.2,8.8 54.1,8.8 48.4,14.5 43.9,14.5
  cutout Route15: 43.9,25.5 48.4,25.5 54.1,31.2 61.2,31.2 64.6,26.8 72.9,26.8 72.9,13.3 64.4,13.3 61.2,8.8 54.2,8.8 54.1,8.8 48.4,14.5 43.9,14.5
  cutout Bottom: 43.9,25.5 48.4,25.5 54.1,31.2 61.2,31.2 64.6,26.8 72.9,26.8 72.9,13.3 64.4,13.3 61.2,8.8 54.2,8.8 54.1,8.8 48.4,14.5 43.9,14.5
S$183  (via drill 0.2)
  Top 0.125: v64.78,12.62 E$29.P$1
  Bottom 0.125: 66.9,11.78 E$13.$2 | 66.9,11.78 67.7,12.58 70.96,12.58 70.96,11.84 71.2,11.6 77,11.6 77.5,11.98 83.12,17.6 E$3.12 | 66.9,11.78 66.03,12.62 v64.78,12.62
S$184
  Top 0.5: 32.65,33.88 arc58 32.22,33.66 31.4,32.25
S$185
  Top 0.5: 35.35,26.85 37.15,28.25 37.4,26.9
S$186
  Top 0.5: 40.4,28.25 40.4,30.62 41.15,31.25 44.4,31.25 | 40.4,28.25 39.4,26.88 | 40.4,28.25 41.52,26.88
S$187
  Top 0.6: 51.65,16 54.9,10.75 56.9,10.75
S$188
  Top 0.6: 56.65,18.65 53.9,18.65 51.55,17.6 45.65,17.6
S$189
  Top 0.6: 66.65,14.75 64.4,14.75
S$190  (via drill 0.2)
  Top 0.125: v67.58,29.72 77.72,29.72 81.84,25.6 E$3.23 | v67.65,27.38 E$30.P$1
  Bottom 0.125: v67.58,29.72 66.9,29.04 E$14.$2 v67.65,27.38
S$191  (via drill 0.3)
  other vias: 56.05,26.02
S$192
  Bottom 1: 63.27,14.75 64.28,14.75
S$193
  Bottom 1: 56.05,15.95 56.05,13.53
S$194
  Bottom 1.2: 59.9,26.5 59.9,25.2
S$195
  Top 0.6: 65.4,23.75 65.4,16.25
S$196  (via drill 0.3)
  other vias: 56.05,15.72
S$197
  Top 0.6: 59.4,28.75 61.65,28.75 62.75,27.35
S$198
  Top 0.6: 59.65,21.25 61.65,21.25 62.75,22.85
S$200
  Top 0.6: 59.4,18.75 61.27,18.74 62.75,16.85
S$201
  Top 0.6: 65.9,14.75 64.4,14.75 63.65,15.7
S$202
  Top 0.6: 63.68,24.2 64.4,25.25
S$203
  Top 0.6: 61.65,10.75 59.65,10.75
S$204
  Top 0.6: 61.65,10.75 62.75,12.35
S$205
  Top 0.6: 63.68,13.7 64.4,14.75
S$206
  Top 0.6: 45.67,16 51.65,16
S$207
  Bottom 1: 61.12,14.75 58.9,14.75
S$208  (via drill 0.2)
  other vias: 59.9,26.7
S$209
  Bottom 1.2: 59.85,13.1 59.85,14.6
S$210  (via drill 0.3)
  other vias: 56.05,24
S$211  (via drill 0.2)
  Top 0.125: v65.4,32.38 62.02,29.75 v61.77,29.75
  Route2 0.125: v44.54,28.04 44.68,28.04 53.58,36.94 65.72,36.94 | 65.72,36.94 68.28,36.94 v76.12,29.1 | 65.72,36.94 65.72,32.72 v65.4,32.38 | v61.77,29.75 61.77,25 v57.77,25
  Bottom 0.125: v44.54,28.04 43.52,28.04 42.52,26.75 41.15,26.75 41.15,24.78 33.76,24.78 30.8,27.74 27.46,27.74 26.66,26.94 E$24.$2 | v76.12,29.1 80.42,24.8 E$3.22 | v57.77,25 E$34.1
S$212  (via drill 0.2)
  other vias: 59.9,23.31
S$213  (via drill 0.3)
  other vias: 56.05,13.77
S$214  (via drill 0.2)
  other vias: 59.85,13.34
S$215  (via drill 0.2)
  other vias: 59.84,16.14
S$216  (via drill 0.2)
  other vias: 59.85,14.17
S$217
  Top 0.5: 45.4,8.75 49.65,8.75
S$218
  Bottom 1: 56.1,14.75 56.8,14.75
S$219
  Top 0.5: 40.52,12.12 40.52,9.5 41.15,8.75 44.4,8.75 | 40.52,12.12 41.4,13.12 | 40.52,12.12 39.4,13.12
S$220
  Bottom 1: 64.15,25 63.52,25
S$221
  Top 0.5: 33.02,6.12 arc-61 31.98,6.73 31.45,7.68
S$222
  Top 0.5: 37.15,11.62 37.15,10.12 38.4,9 38.4,7 37.65,6.12 34.9,6.12 | 37.15,11.62 37.4,13.12 | 37.15,11.62 35.4,13.12
S$223
  Top 0.5: 30.02,10.12 31.72,7.18
S$224
  Top 0.5: 31.77,32.88 29.97,29.77
S$225
  Top 0.125: 44.54,28.04 43.51,28.04 42.52,26.75 E$1.P$43

## Text on the board
tPlace: RF-BOARD V2.4 / Guitar Recall | 3 | 8 | 4 | 2 | 24 | 24 | 22 | 22 | 20 | 19 | 21 | 10 | 21 | 19 | 17 | 17 | 15
bPlace: 01 | 03 | 02 | 4 | 04 | 8 | 05 | 06 | 5 | 08 | 6 | 9 | 07 | 10 | 5 | 09 | 2 | 3 | 11 | 12 | 1 | 9 | 6 | 1 | 13 | 23 | 23 | 15 | 14 | 17 | 19 | 16 | 18 | 20 | 10 | 11 | 18 | 21 | 20 | 16 | 16 | 22 | 13 | 18 | 14 | 23 | 24 | 13 | 15 | 25 | 11 | 14